# Altium PCB upper-pcb.PcbDoc
Units mil, origin at the board's own origin, x right, y up, seen from the top; angles counter-clockwise.
Board outline 1799.21 x 2429.13 mil, 2 copper layers (Top Layer, Bottom Layer), stack 63.824 mil thick; 78 components, 65 nets, 267 pads, 70 vias.
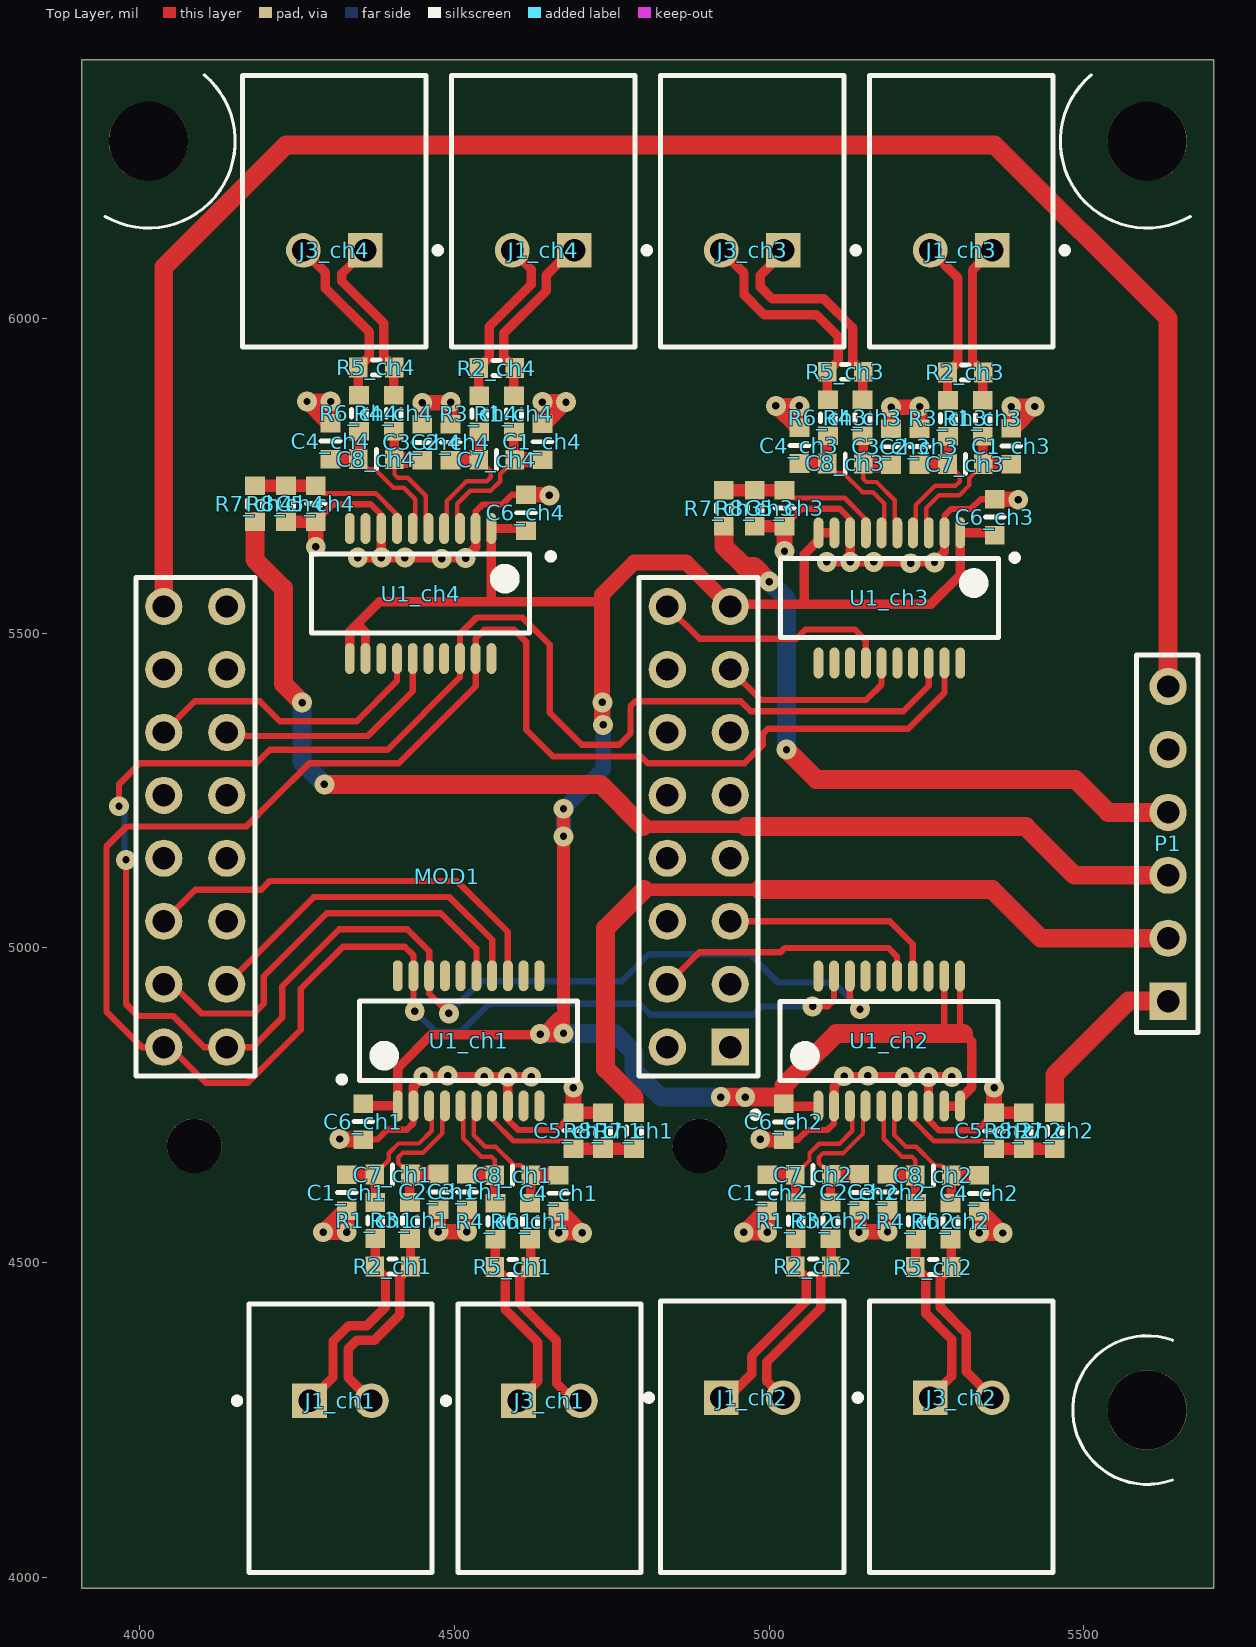
[diagram p0: Top Layer view]
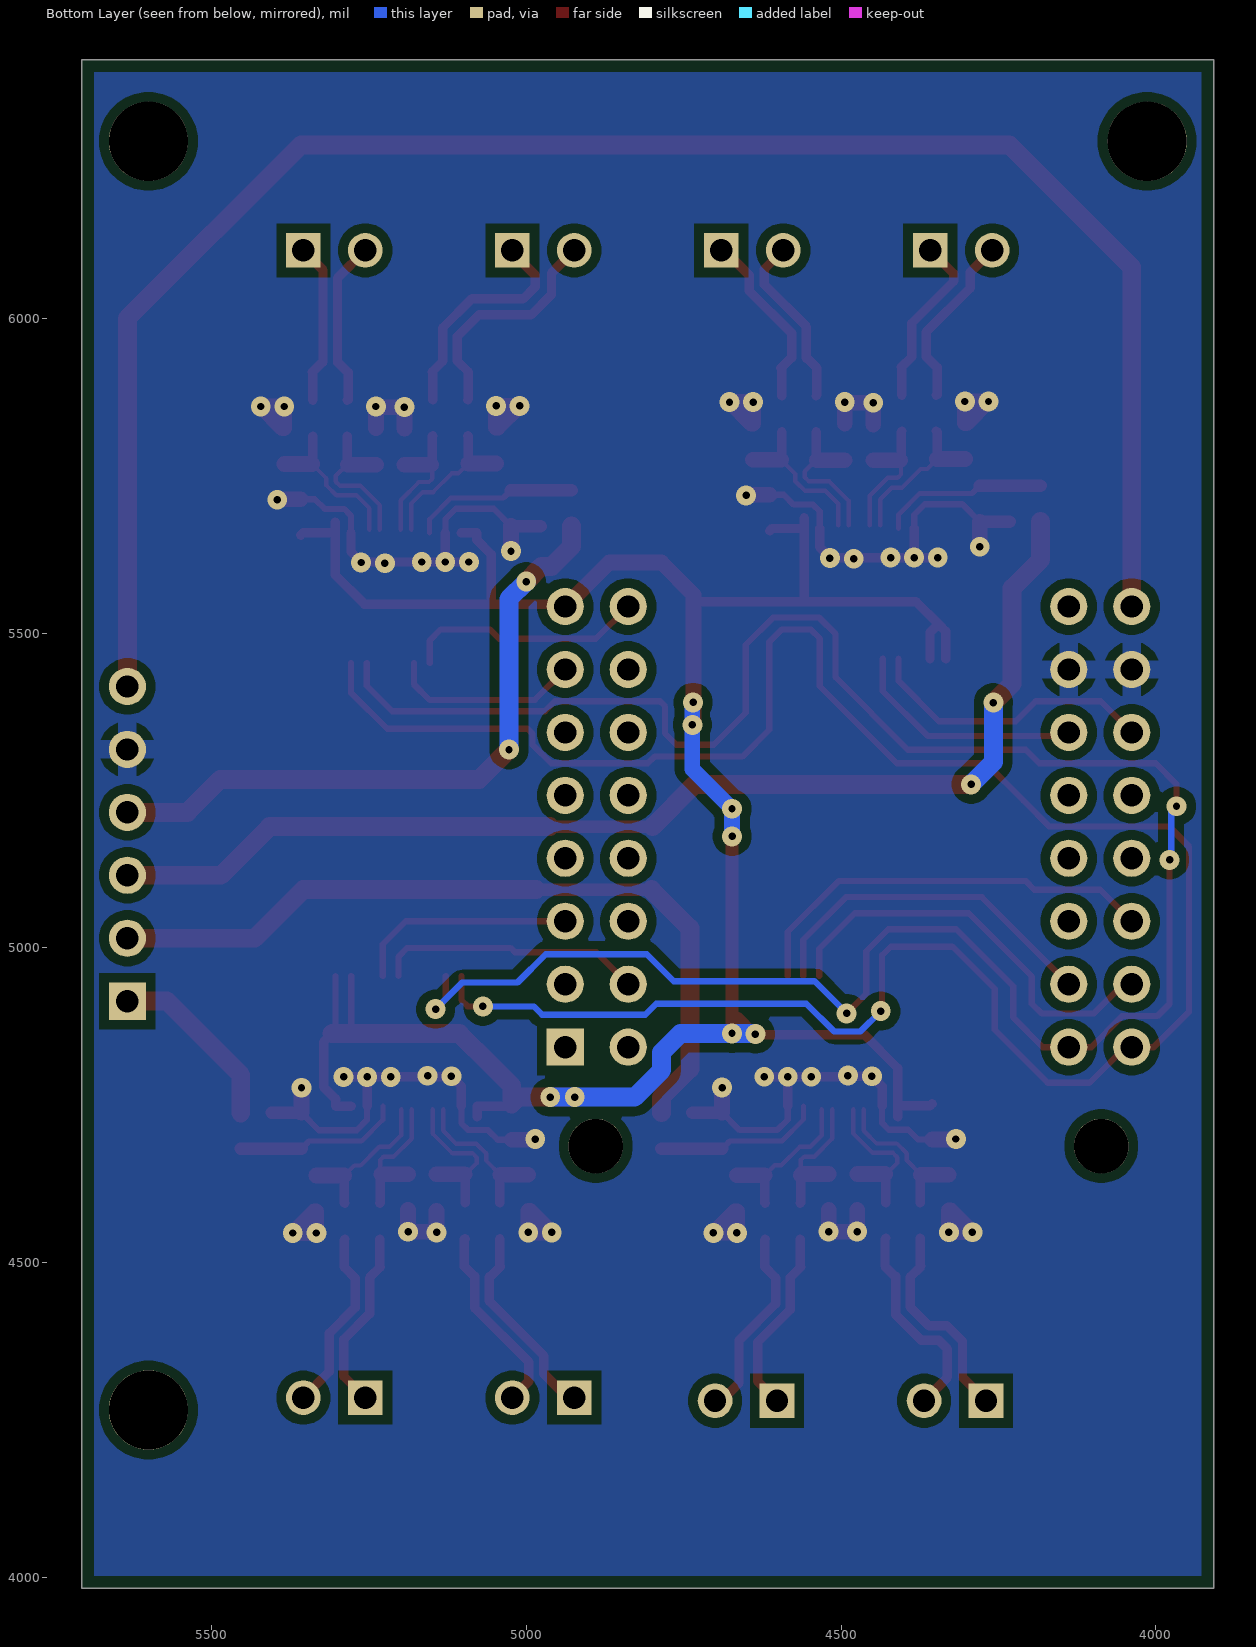
[diagram p1: Bottom Layer view, seen from below]

## Layer stack, top to bottom
Top Solder: solder mask 0.4, Solder Resist, Dk 3.5
Top Layer: signal copper 1.4
Dielectric 1: dielectric 61.0236, FR-4, Dk 4.8
Bottom Layer: signal copper 1.4
Bottom Solder: solder mask 0.4, Solder Resist, Dk 3.5

## Board outline
3907.48,3982.28 3907.48,6411.42 5706.69,6411.42 5706.69,3982.28

## Design rules (kind name [scope] priority, off if disabled: settings)
BoardOutlineClearance [All] p1: gap=19.68 ignorepadtopadclearanceinfootprint=FALSE
Clearance Clearance_polygon [InPolygon] p1: gap=15 ignorepadtopadclearanceinfootprint=FALSE
Clearance [All] p2: gap=8 ignorepadtopadclearanceinfootprint=FALSE
ComponentClearance ComponentClearance_1 [InComponent('No Component') vs InComponent('No Component')] p1: gap=0 collisioncheckmode=3 verticalgap=0 showdistances=FALSE donotcheckwithout3dbody=TRUE
ComponentClearance ComponentClearance_2 [HasFootprint('DG128-7.5-02P-14') vs HasFootprint('DG128-7.5-02P-14')] p2: gap=0 collisioncheckmode=3 verticalgap=0 showdistances=FALSE donotcheckwithout3dbody=TRUE
ComponentClearance [All] p3: gap=10 collisioncheckmode=3 verticalgap=10 showdistances=FALSE donotcheckwithout3dbody=TRUE
HoleSize [All] p1: absolutevalues=TRUE maxlimit=196.85 minlimit=11.81 maxpercent=80.000 minpercent=20.000
MinimumAnnularRing [All] p1: minimumring=8
MinimumSolderMaskSliver MinimumSolderMaskSliver-SSOP [HasFootprint('SSOP20_3.9x8.65') vs HasFootprint('SSOP20_3.9x8.65')] p1: minsoldermaskwidth=1
MinimumSolderMaskSliver MinimumSolderMaskSliver_1 [All] p2: minsoldermaskwidth=4.7
PolygonConnect VIA [IsVia] p1: connectstyle=Direct reliefconductorwidth=10 reliefentries=4 polygonreliefangle="90 Angle" airgapwidth=10
PolygonConnect [All] p2: connectstyle=Relief reliefconductorwidth=30 reliefentries=4 polygonreliefangle="90 Angle" airgapwidth=15
RoomDefinition ch2 [InComponentClass('ch2')] p1: confinementstyle=ConfineIn formatcopy=TRUE lockcomponents=FALSE outline 4788,3962.35 5483.2,3962.35 5483.2,4997.79 4788,4997.79
RoomDefinition ch3 [InComponentClass('ch3')] p2: confinementstyle=ConfineIn formatcopy=TRUE lockcomponents=FALSE outline 5489,6445.79 4807,6445.79 4807,5410.35 5489,5410.35
RoomDefinition ch4 [InComponentClass('ch4')] p3: confinementstyle=ConfineIn formatcopy=TRUE lockcomponents=FALSE outline 4816,6452.76 4153.54,6452.76 4153.54,5417.32 4816,5417.32
RoomDefinition ch1 [InComponentClass('ch1')] p4: confinementstyle=ConfineIn formatcopy=TRUE lockcomponents=FALSE outline 4133.86,3962.6 4814.96,3962.6 4814.96,4998.03 4133.86,4998.03
RoutingVias [All] p1: holewidth=11.81 width=31.5 viastyle="Through Hole" minholewidth=11.81 minwidth=31.5 maxholewidth=11.81 maxwidth=31.5
SilkToSilkClearance [All] p1: silktosilkclearance=1
SilkToSolderMaskClearance [IsPad] p1: minsilkscreentomaskgap=1 clearancetoexposedcopper=TRUE
SolderMaskExpansion SolderMaskExpansion-Via [IsVia] p1: expansion=4 istentingtop=TRUE
SolderMaskExpansion SolderMaskExpansion_1 [All] p2: expansion=4 istentingtop=FALSE
Width [All] p1: maxlimit=100 minlimit=7 preferedwidth=10 minimp=50.000000 maximp=50.000000 favimp=50.000000
25 further rules are at their usual default settings.

## Classes and differential pairs
channel class channel: ch1 ch2 ch3 ch4
component class upper-pcb: MOD1 P1
component class ch4: C1_ch4 C2_ch4 C3_ch4 C4_ch4 C5_ch4 C6_ch4 C7_ch4 C8_ch4 J1_ch4 J3_ch4 R1_ch4 R2_ch4 R3_ch4 R4_ch4 R5_ch4 R6_ch4 R7_ch4 R8_ch4 U1_ch4 U4
component class ch3: C1_ch3 C2_ch3 C3_ch3 C4_ch3 C5_ch3 C6_ch3 C7_ch3 C8_ch3 J1_ch3 J3_ch3 R1_ch3 R2_ch3 R3_ch3 R4_ch3 R5_ch3 R6_ch3 R7_ch3 R8_ch3 U1_ch3 U3
component class ch2: C1_ch2 C2_ch2 C3_ch2 C4_ch2 C5_ch2 C6_ch2 C7_ch2 C8_ch2 J1_ch2 J3_ch2 R1_ch2 R2_ch2 R3_ch2 R4_ch2 R5_ch2 R6_ch2 R7_ch2 R8_ch2 U1_ch2 U2
component class ch1: C1_ch1 C2_ch1 C3_ch1 C4_ch1 C5_ch1 C6_ch1 C7_ch1 C8_ch1 J1_ch1 J3_ch1 R1_ch1 R2_ch1 R3_ch1 R4_ch1 R5_ch1 R6_ch1 R7_ch1 R8_ch1 U1_ch1

## Components (designator, comment, footprint, x,y, rotation, side; value= is the part's Value field where it differs from the comment)
C1_ch1 "Ceramic X7R" C_0603_1608 4328.74,4611.2 r270 top value=33nF (schematic designator C1)
C1_ch2 "Ceramic X7R" C_0603_1608 4996.98,4610.96 r270 top value=33nF (schematic designator C1)
C1_ch3 "Ceramic X7R" C_0603_1608 5384.65,5797.18 r90 top value=33nF (schematic designator C1)
C1_ch4 "Ceramic X7R" C_0603_1608 4639.76,5804.15 r90 top value=33nF (schematic designator C1)
C2_ch1 "Ceramic X7R" C_0603_1608 4474.41,4612.2 r90 top value=33nF (schematic designator C2)
C2_ch2 "Ceramic X7R" C_0603_1608 5142.98,4611.76 r90 top value=33nF (schematic designator C2)
C2_ch3 "Ceramic X7R" C_0603_1608 5238.65,5796.39 r270 top value=33nF (schematic designator C2)
C2_ch4 "Ceramic X7R" C_0603_1608 4493.77,5803.35 r270 top value=33nF (schematic designator C2)
C3_ch1 "Ceramic X7R" C_0603_1608 4519.69,4612.2 r270 top value=33nF (schematic designator C3)
C3_ch2 "Ceramic X7R" C_0603_1608 5187.93,4611.96 r270 top value=33nF (schematic designator C3)
C3_ch3 "Ceramic X7R" C_0603_1608 5193.7,5796.18 r90 top value=33nF (schematic designator C3)
C3_ch4 "Ceramic X7R" C_0603_1608 4448.82,5803.15 r90 top value=33nF (schematic designator C3)
C4_ch1 "Ceramic X7R" C_0603_1608 4665.35,4610.24 r90 top value=33nF (schematic designator C4)
C4_ch2 "Ceramic X7R" C_0603_1608 5333.6,4609.99 r90 top value=33nF (schematic designator C4)
C4_ch3 "Ceramic X7R" C_0603_1608 5048.03,5798.15 r270 top value=33nF (schematic designator C4)
C4_ch4 "Ceramic X7R" C_0603_1608 4303.15,5805.12 r270 top value=33nF (schematic designator C4)
C5_ch1 "Ceramic X7R" C_0603_1608 4688.98,4709.65 r90 top value=33nF (schematic designator C5)
C5_ch2 "Ceramic X7R" C_0603_1608 5357.22,4709.4 r90 top value=33nF (schematic designator C5)
C5_ch3 "Ceramic X7R" C_0603_1608 5024.41,5698.74 r270 top value=33nF (schematic designator C5)
C5_ch4 "Ceramic X7R" C_0603_1608 4279.53,5705.71 r270 top value=33nF (schematic designator C5)
C6_ch1 "Ceramic X7R" C_0603_1608 4355,4724 r270 top value=100nF (schematic designator C6)
C6_ch2 "Ceramic X7R" C_0603_1608 5023.24,4723.76 r270 top value=100nF (schematic designator C6)
C6_ch3 "Ceramic X7R" C_0603_1608 5358.39,5684.39 r90 top value=100nF (schematic designator C6)
C6_ch4 "Ceramic X7R" C_0603_1608 4613.5,5691.35 r90 top value=100nF (schematic designator C6)
C7_ch1 "Ceramic X7R" C_0603_1608 4401.57,4639.75 r0 top value=33nF (schematic designator C7)
C7_ch2 "Ceramic X7R" C_0603_1608 5069.82,4639.5 r0 top value=33nF (schematic designator C7)
C7_ch3 "Ceramic X7R" C_0603_1608 5311.81,5768.64 r180 top value=33nF (schematic designator C7)
C7_ch4 "Ceramic X7R" C_0603_1608 4566.93,5775.61 r180 top value=33nF (schematic designator C7)
C8_ch1 "Ceramic X7R" C_0603_1608 4592.52,4638.78 r0 top value=33nF (schematic designator C8)
C8_ch2 "Ceramic X7R" C_0603_1608 5260.76,4638.54 r0 top value=33nF (schematic designator C8)
C8_ch3 "Ceramic X7R" C_0603_1608 5120.87,5769.61 r180 top value=33nF (schematic designator C8)
C8_ch4 "Ceramic X7R" C_0603_1608 4375.98,5776.57 r180 top value=33nF (schematic designator C8)
J1_ch1 "S2B-XH-A-1(LF)(SN)" FP-S2B-XH-A-1_LF_SN-MFG 4318.9,4207.68 r180 top locked (schematic designator J1)
J1_ch2 "S2B-XH-A-1(LF)(SN)" FP-S2B-XH-A-1_LF_SN-MFG 4973.1,4212.6 r180 top locked (schematic designator J1)
J1_ch3 "S2B-XH-A-1(LF)(SN)" FP-S2B-XH-A-1_LF_SN-MFG 5305.12,6181.1 r0 top locked (schematic designator J1)
J1_ch4 "S2B-XH-A-1(LF)(SN)" FP-S2B-XH-A-1_LF_SN-MFG 4641.08,6181.1 r0 top locked (schematic designator J1)
J3_ch1 "S2B-XH-A-1(LF)(SN)" FP-S2B-XH-A-1_LF_SN-MFG 4650.92,4207.68 r180 top locked (schematic designator J3)
J3_ch2 "S2B-XH-A-1(LF)(SN)" FP-S2B-XH-A-1_LF_SN-MFG 5305.12,4212.6 r180 top locked (schematic designator J3)
J3_ch3 "S2B-XH-A-1(LF)(SN)" FP-S2B-XH-A-1_LF_SN-MFG 4973.1,6181.1 r0 top locked (schematic designator J3)
J3_ch4 "S2B-XH-A-1(LF)(SN)" FP-S2B-XH-A-1_LF_SN-MFG 4309.06,6181.1 r0 top locked (schematic designator J3)
MOD1 "ESP32-S2FN4R2 mini wifi board" MOD_ESP32_WEMOS_S2_MINI 4488.19,5208.66 r180 top locked value=MOD_ESP32_WEMOS_S2_MINI
P1 "Goldpin" P_HEADER_1x6_2.54 5633.86,5165.35 r90 top value=DS1021-1*6SF1-1
R1_ch1 "Resistor" R_0603_1608 4374.02,4566.91 r90 top value=1k (schematic designator R1)
R1_ch2 "Resistor" R_0603_1608 5042.26,4566.67 r90 top value=1k (schematic designator R1)
R1_ch3 "Resistor" R_0603_1608 5339.37,5841.47 r270 top value=1k (schematic designator R1)
R1_ch4 "Resistor" R_0603_1608 4594.49,5848.44 r270 top value=1k (schematic designator R1)
R2_ch1 "Resistor" R_0603_1608 4401.57,4494.08 r0 top value=3.3R (schematic designator R2)
R2_ch2 "Resistor" R_0603_1608 5069.82,4493.83 r0 top value=3.3R (schematic designator R2)
R2_ch3 "Resistor" R_0603_1608 5311.81,5914.31 r180 top value=3.3R (schematic designator R2)
R2_ch4 "Resistor" R_0603_1608 4566.93,5921.28 r180 top value=3.3R (schematic designator R2)
R3_ch1 "Resistor" R_0603_1608 4429.13,4566.91 r90 top value=1k (schematic designator R3)
R3_ch2 "Resistor" R_0603_1608 5097.38,4566.67 r90 top value=1k (schematic designator R3)
R3_ch3 "Resistor" R_0603_1608 5284.25,5841.47 r270 top value=1k (schematic designator R3)
R3_ch4 "Resistor" R_0603_1608 4539.37,5848.44 r270 top value=1k (schematic designator R3)
R4_ch1 "Resistor" R_0603_1608 4564.96,4565.94 r90 top value=1k (schematic designator R4)
R4_ch2 "Resistor" R_0603_1608 5233.2,4565.7 r90 top value=1k (schematic designator R4)
R4_ch3 "Resistor" R_0603_1608 5148.43,5842.44 r270 top value=1k (schematic designator R4)
R4_ch4 "Resistor" R_0603_1608 4403.54,5849.41 r270 top value=1k (schematic designator R4)
R5_ch1 "Resistor" R_0603_1608 4592.52,4493.11 r0 top value=3.3R (schematic designator R5)
R5_ch2 "Resistor" R_0603_1608 5260.76,4492.87 r0 top value=3.3R (schematic designator R5)
R5_ch3 "Resistor" R_0603_1608 5120.87,5915.28 r180 top value=3.3R (schematic designator R5)
R5_ch4 "Resistor" R_0603_1608 4375.98,5922.24 r180 top value=3.3R (schematic designator R5)
R6_ch1 "Resistor" R_0603_1608 4620.08,4565.94 r90 top value=1k (schematic designator R6)
R6_ch2 "Resistor" R_0603_1608 5288.32,4565.7 r90 top value=1k (schematic designator R6)
R6_ch3 "Resistor" R_0603_1608 5093.31,5842.44 r270 top value=1k (schematic designator R6)
R6_ch4 "Resistor" R_0603_1608 4348.43,5849.41 r270 top value=1k (schematic designator R6)
R7_ch1 "Resistor" R_0603_1608 4785.43,4709.65 r270 top value=10k (schematic designator R7)
R7_ch2 "Resistor" R_0603_1608 5453.68,4709.4 r270 top value=10k (schematic designator R7)
R7_ch3 "Resistor" R_0603_1608 4927.95,5698.74 r90 top value=10k (schematic designator R7)
R7_ch4 "Resistor" R_0603_1608 4183.07,5705.71 r90 top value=10k (schematic designator R7)
R8_ch1 "Resistor" R_0603_1608 4736.22,4709.65 r270 top value=1k (schematic designator R8)
R8_ch2 "Resistor" R_0603_1608 5404.46,4709.4 r270 top value=1k (schematic designator R8)
R8_ch3 "Resistor" R_0603_1608 4977.17,5698.74 r90 top value=1k (schematic designator R8)
R8_ch4 "Resistor" R_0603_1608 4232.28,5705.71 r90 top value=1k (schematic designator R8)
U1_ch1 "Electrical mains 2-ch power meter" SSOP20_3.9x8.65 4522.34,4852.36 r0 top value=BL0939 (schematic designator U1)
U1_ch2 "Electrical mains 2-ch power meter" SSOP20_3.9x8.65 5190.59,4852.12 r0 top value=BL0939 (schematic designator U1)
U1_ch3 "Electrical mains 2-ch power meter" SSOP20_3.9x8.65 5191.04,5556.02 r180 top value=BL0939 (schematic designator U1)
U1_ch4 "Electrical mains 2-ch power meter" SSOP20_3.9x8.65 4446.16,5562.99 r180 top value=BL0939 (schematic designator U1)

## Footprints (in the part's own frame and the unit in brackets; to place one, negate y for a bottom-side part, rotate by r counter-clockwise, add the part's x,y. Pads: shape width x height; smd on the part's side, far side on the other; paste and mask are expansions set on the pad)
C_0603_1608 [mm]
  rect 0.75x0.8 smd: 1(-0.725,0) 2(0.725,0)
  silkscreen extent 0,-0.38 0,0.38, body extent -0.85,-0.45 0.85,0.45, height 0.89
FP-S2B-XH-A-1_LF_SN-MFG [mm]
  rect 1.4x1.4 hole 0.9 paste-2539.97 mask+0: 1(1.25,-1.85)
  round 1.4 hole 0.9 paste-2539.97 mask+0: 2(-1.25,-1.85)
  silkscreen extent -3.7,-5.75 4.3,5.08, body extent -3.8,-5.85 3.8,5.85, height 0.25
MOD_ESP32_WEMOS_S2_MINI [mm]
  rect 1.5x1.5 hole 0.9: 1(-11.43,9.305)
  round 1.5 hole 0.9: 2(-8.89,9.305) 3(-11.43,6.765) 4(-8.89,6.765) 5(-11.43,4.225) 6(-8.89,4.225) 7(-11.43,1.685) 8(-8.89,1.685) 9(-11.43,-0.855) 10(-8.89,-0.855) 11(-11.43,-3.395) 12(-8.89,-3.395) 13(-11.43,-5.935) 14(-8.89,-5.935) 15(-11.43,-8.475) 16(-8.89,-8.475) 17(8.89,9.305) 18(11.43,9.305) 19(8.89,6.765) 20(11.43,6.765) 21(8.89,4.225) 22(11.43,4.225) 23(8.89,1.685) 24(11.43,1.685) 25(8.89,-0.855) 26(11.43,-0.855) 27(8.89,-3.395) 28(11.43,-3.395) 29(8.89,-5.935) 30(11.43,-5.935) 31(8.89,-8.475) 32(11.43,-8.475)
  round 2.2 hole 2.2 unplated: DNC(-10.2,13.297) DNC(10.2,13.297)
  silkscreen extent -12.55,-9.64 12.55,10.47, body extent -12.74,-17.16 13.68,17.15, height 15.07
P_HEADER_1x6_2.54 [mm] "Connector; Header; 6 Position, Male"
  rect 1.5x1.5 hole 0.9: 1(-6.35,0)
  round 1.5 hole 0.9: 2(-3.81,0) 3(-1.27,0) 4(1.27,0) 5(3.81,0) 6(6.35,0)
  silkscreen extent -7.62,-1.2 7.62,1.27, body extent -7.52,-1.25 7.72,1.25, height 8.2
R_0603_1608 [mm]
  rect 0.75x0.8 smd: 1(-0.725,0) 2(0.725,0)
  silkscreen extent -0.15,-0.3 0.15,0.3, body extent -0.87,-0.47 0.88,0.48, height 0.54
SSOP20_3.9x8.65 [mm]
  oval 0.4x1.25 smd: 1(-2.857,-2.625) 2(-2.222,-2.625) 3(-1.587,-2.625) 4(-0.953,-2.625) 5(-0.318,-2.625) 6(0.318,-2.625) 7(0.953,-2.625) 8(1.587,-2.625) 9(2.222,-2.625) 10(2.857,-2.625) 11(2.857,2.625) 12(2.222,2.625) 13(1.587,2.625) 14(0.953,2.625) 15(0.318,2.625) 16(-0.318,2.625) 17(-0.953,2.625) 18(-1.587,2.625) 19(-2.222,2.625) 20(-2.857,2.625)
  silkscreen extent -5.24,-1.68 4.4,1.6, body extent -4.33,-2.96 4.33,2.96, height 1.68

## Part data
C1_ch1 C1_ch2 C1_ch3 C1_ch4 C2_ch1 C2_ch2 C2_ch3 C2_ch4 C3_ch1 C3_ch2 C3_ch3 C3_ch4 C4_ch1 C4_ch2 C4_ch3 C4_ch4 C5_ch1 C5_ch2 C5_ch3 C5_ch4 C7_ch1 C7_ch2 C7_ch3 C7_ch4 C8_ch1 C8_ch2 C8_ch3 C8_ch4: library part C_33nF_50V_X7R_0603_10, "Capacitor", Dielectric=X7R, Manufacturer=Yageo, Manufacturer Part Number=CC0603KRX7R9BB333, Tolerance (%)=10, Voltage=50V, HelpURL=https://datasheet.octopart.com/CC0603KRX7R9BB333-Yageo-datasheet-10883670.pdf, Part Number=C_33nF_50V_X7R_0603_10, SCH_Footprint=0603, Supplier 1=TME, Supplier 2="RS Components", Supplier 3=Farnell, Supplier 4=Mouser, Supplier 5=Digi-Key, Supplier 6=LCSC
C6_ch1 C6_ch2 C6_ch3 C6_ch4: library part C_100nF_50V_X7R_0603_5, "Capacitor", Dielectric=X7R, Manufacturer=Samsung, Manufacturer Part Number=CL10B104JB8NNNC, Tolerance (%)=5, Voltage=50V, HelpURL=http://www.tme.eu/pl/Document/4a42202b32dab16128fe107dd69598cc/samsung-chip-cap.pdf, Part Number=C_100nF_50V_X7R_0603_5, SCH_Footprint=0603, Supplier 1=TME, Supplier 2="RS Components", Supplier 3=Farnell, Supplier 4=Mouser, Supplier 5=Digi-Key, Supplier 6=LCSC, Supplier Part Number 1=CL10B104JB8NNNC, Supplier Part Number 2=7665455, Supplier Part Number 5=1276-1033-1-ND, Supplier Part Number 6=C24452
J1_ch1 J1_ch2 J1_ch3 J1_ch4 J3_ch1 J3_ch2 J3_ch3 J3_ch4: library part CMP-17439-000260-1, "CONN HEADER R/A 2POS 2.5MM", Flammability Rating="UL94 V-0", Insulation Color=Natural, Max Operating Temperature=85°C, Min Operating Temperature=-25°C, Voltage Rating=250V, Connector Type=Header, Contact Finish - Mating=TIN, Contact Material=Brass, Contact Shape=Square, Contact Type="Male Pin", Fastening Type=Detent, Insulation Material=Nylon, Lead Free="Lead Free", Mount="Through Hole", Number of Positions=2, Number of Rows=1, Packaging=Bulk, Series=XH, Termination=Press-Fit
MOD1: library part MOD_ESP32_WEMOS_S2_MINI, Manufacturer=Wemos, HelpURL=https://www.wemos.cc/en/latest/s2/s2_mini.html, Manufacturer Part Number=MOD_ESP32_WEMOS_S2_MINI, Part Number=MOD_ESP32_WEMOS_S2_MINI, SCH_Footprint=25.4x34.3mm, Supplier 1=TME, Supplier 2="RS Components", Supplier 3=Farnell, Supplier 4=Mouser, Supplier 5=Digi-Key, Supplier 6=LCSC, Supplier 7=Aliexpress, Supplier Part Number 7=https://pl.aliexpress.com/item/1005003145192016.html
P1: library part P_HEADER_1x6_2.54, "Pin Header", Manufacturer=Connfly, Manufacturer Part Number=DS1021-1*6SF1-1, Supplier Part Number 1=ZL201-06G, HelpURL=http://www.tme.eu/en/Document/cc301e58a5da78cb543a94b5a5b7f06a/DS1021.pdf, Part Number=P_HEADER_1x6_2.54, SCH_Footprint="1x6 2.54mm", Supplier 1=TME, Supplier 2="RS Components", Supplier 3=Farnell, Supplier 4=Mouser, Supplier 5=Digi-Key, Supplier 6=LCSC
R1_ch1 R1_ch2 R1_ch3 R1_ch4 R3_ch1 R3_ch2 R3_ch3 R3_ch4 R4_ch1 R4_ch2 R4_ch3 R4_ch4 R6_ch1 R6_ch2 R6_ch3 R6_ch4 R8_ch1 R8_ch2 R8_ch3 R8_ch4: library part R_1k_0603_1, Manufacturer=Vishay, Manufacturer Part Number=CRCW06031K00FKEA, Power=100mW, Tolerance=1%, Voltage=75V, HelpURL=http://www.farnell.com/datasheets/2310790.pdf?_ga=2.256888843.1690599162.1548417389-1379097396.1542296996&_gac=1.262631934.1547230258.Cj0KCQiAmuHhBRD0ARIsAFWyPwhX8HcvXnM3tA0ZBodZLzDIjH2ZxLpjT5LWo9bad_HPRbU8LfPq44UaAhEwEALw_wcB, Part Number=R_1k_0603_1, SCH_Footprint=0603, Supplier 1=TME, Supplier 2="RS Components", Supplier 3=Farnell, Supplier 4=Mouser, Supplier 5=Digi-Key, Supplier 6=LCSC, Supplier Part Number 2=678-9875P, Supplier Part Number 3=1469740, Supplier Part Number 4=71-CRCW0603-1.0K-E3, Supplier Part Number 5=541-1.00KHCT-ND
R2_ch1 R2_ch2 R2_ch3 R2_ch4 R5_ch1 R5_ch2 R5_ch3 R5_ch4: library part R_3.3R_0603_5, Manufacturer=Yageo, Manufacturer Part Number=RC0603JR-073R3L, Power=100mW, Supplier Part Number 1=RC0603JR-073R3, Tolerance=5%, Voltage=50V, HelpURL=https://datasheet.octopart.com/RC0603JR-073R3L-Yageo-datasheet-8328172.pdf, Part Number=R_3.3R_0603_5, SCH_Footprint=0603, Supplier 1=TME, Supplier 2="RS Components", Supplier 3=Farnell, Supplier 4=Mouser, Supplier 5=Digi-Key, Supplier 6=LCSC, Supplier Part Number 4=603-RC0603JR-073R3L, Supplier Part Number 5=311-3.3GRCT-ND
R7_ch1 R7_ch2 R7_ch3 R7_ch4: library part R_10k_0603_1, Manufacturer=Vishay, Manufacturer Part Number=CRCW060310K0FKTABC, Power=100mW, Tolerance=1%, Voltage=75V, HelpURL=http://www.tme.eu/pl/Document/622e28308c06d160637f2b14751ba16b/Data%20Sheet%20CRCW_BCe3.pdf, Part Number=R_10k_0603_1, SCH_Footprint=0603, Supplier 1=TME, Supplier 2="RS Components", Supplier 3=Farnell, Supplier 4=Mouser, Supplier 5=Digi-Key, Supplier 6=LCSC, Supplier Part Number 1=CRCW060310K0FKTABC, Supplier Part Number 4=667-ERJ-3EKF1002V, Supplier Part Number 5=P10KGCT-ND
U1_ch1 U1_ch2 U1_ch3 U1_ch4: library part U_BL0939, Manufacturer=Belling, Manufacturer Part Number=BL0939, HelpURL=https://www.belling.com.cn/media/file_object/bel_product/BL0939/datasheet/BL0939_V1.2_cn.pdf, Part Number=U_BL0939, SCH_Footprint=SSOP20, Supplier 1=TME, Supplier 2="RS Components", Supplier 3=Farnell, Supplier 4=Mouser, Supplier 5=Digi-Key, Supplier 6=LCSC, Supplier 7=Aliexpress, Supplier Part Number 6=C2841044, Supplier Part Number 7=BL0939

## Free pads (board coordinates)
  round 125.98 hole 125.98 unplated: ""(4013.78,6281.5) ""(5600.39,4265.75) ""(5600.39,6281.5)

## Via types
v1: diameter 31.5, hole 11.81, Top Layer to Bottom Layer, tented both sides, 70 vias

## Nets (pads, with @x,y where several pads share a name; then routed paths per layer and width w, separated by ;. In a path a pad name is that pad's centre, name@x,y a point inside that pad or via, vN(x,y) a via of type N, cw(c..) or ccw(c..) an arc to the next point about the centre after c; other vN are vias at no path point)
+3.3V: C6_ch1.1 C6_ch2.1 C6_ch3.1 C6_ch4.1 MOD1.15 U1_ch1.1 U1_ch2.1 U1_ch2.9 U1_ch2.10 U1_ch2.11 U1_ch2.12 U1_ch3.1 U1_ch3.9 U1_ch3.10 U1_ch4.1 U1_ch4.11 U1_ch4.12 | length 4200.3
  Top Layer w10: 5277,4864 5278.09,4865.09 U1_ch2.12 ; U1_ch2.11 5303.09,4869.41 5308.5,4864
  Top Layer w15: U1_ch4.11 4333.66,5502.83 4345.42,5514.58 ; C6_ch1.1 4358.53,4749.02 U1_ch1.1 ; U1_ch4.12 4358.66,5501.34 4345.42,5514.58 ; U1_ch1.1@4409.84,4731.69 U1_ch1.1 ; 4420,5549.75 4380.58,5549.75 ; U1_ch4.1@4558.66,5683.66 U1_ch4.1 ; C6_ch4.1 4609.98,5666.34 U1_ch4.1 ; v1@4636,4862.2 4463.2,4862.2 4409.84,4808.84 U1_ch1.1 ; 4734.25,5550 4734,5549.75 4558.66,5549.75 ; MOD1.15 4942.05,5546.18 5055.63,5546.18 ; C6_ch2.1 5026.77,4748.77 U1_ch2.1 U1_ch2.1@5078.09,4731.45 ; U1_ch3.9 U1_ch3.10 5078.54,5648.06 5055.63,5625.14 5055.63,5546.18 ; U1_ch2.9 U1_ch2.10 5303.09,4760.09 5322,4779 5322,4850.5 5308.5,4864 ; U1_ch3.1@5303.54,5676.69 U1_ch3.1 ; C6_ch3.1 5354.86,5659.37 U1_ch3.1 ; 4345.42,5514.58 4380.58,5549.75 ; 4380.58,5549.75 4558.66,5549.75 ; 4558.66,5549.75 U1_ch4.1 ; 5055.63,5546.18 5257.18,5546.18 5303.54,5592.54 U1_ch3.1
  Top Layer w20: v1@4639.56,4863 4665.56,4889 4673.23,4889 ; v1(4673.23,4864.17) 4673.23,4889 ; v1(4673.23,5221.09) 4673.23,4889
  Top Layer w25: v1(4636,4863) 4639.56,4863 4672.06,4863 v1(4673.23,4864.17) ; v1(4736.22,5354.33) 4734.25,5356.3 4734.25,5550 4734.25,5561.25 4785.2,5612.2 4868.31,5612.2 MOD1.15
  Top Layer w30: v1(4923,4763) v1(4962,4763) 5012.54,4763 C6_ch2.1 5023.24,4781 5055.51,4813.27 5106.24,4864 5277,4864 5308.5,4864
  Bottom Layer w25: v1(4673.17,5177.17) 4673.17,5221.04 v1(4673.23,5221.09) 4736.22,5284.09 v1(4736.22,5354.33) 4736.22,5388.78 v1(4735,5390)
  Bottom Layer w30: v1(4636,4863) 4637.17,4864.17 v1(4673.23,4864.17) 4754.83,4864.17 4785,4834 4785,4806 4828,4763 v1(4923,4763) v1(4962,4763)
C1_ch1_N: J1_ch1.2 R2_ch1.2 R3_ch1.1 | length 332.1
  Top Layer w15: J1_ch1.2 4331,4317.62 4331,4363 4345,4377 4373,4377 4413.39,4417.39 4413.39,4477.35 ; 4413.39,4478.35 4413.39,4477.35 ; R3_ch1.1 4430.12,4537.39 R2_ch1.2 4413.39,4477.35
C1_ch1_P: J1_ch1.1 R1_ch1.1 R2_ch1.1 | length 343.3
  Top Layer w15: J1_ch1.1@4279.51,4280.51 J1_ch1.1 4307,4317.83 4307,4375 4332,4400 4361,4400 4390.39,4429.39 4390.39,4476.72 ; R1_ch1.1 4374.02,4495.06 R2_ch1.1 4390.39,4476.72 ; 4390.39,4477.72 4390.39,4476.72
C1_ch2_N: J1_ch2.2 R2_ch2.2 R3_ch2.1 | length 321
  Top Layer w15: J1_ch2.2 4996,4311.74 4996,4342 5081.63,4427.63 5081.63,4477.1 ; J1_ch2.2@5026.75,4289.87 J1_ch2.2@5036.35,4280.27 ; 5081.63,4478.1 5081.63,4477.1 ; R3_ch2.1 5098.36,4537.14 R2_ch2.2 5081.63,4477.1
C1_ch2_P: J1_ch2.1 R1_ch2.1 R2_ch2.1 | length 323.3
  Top Layer w15: J1_ch2.1 4934.43,4285.43 4972,4323 4972,4352 5058.63,4438.63 5058.63,4476.48 ; R1_ch2.1 5042.26,4494.82 R2_ch2.1 5058.63,4476.48 ; 5058.63,4477.48 5058.63,4476.48
C1_ch3_N: J1_ch3.2 R2_ch3.2 R3_ch3.1 | length 264.9
  Top Layer w15: J1_ch3.2 5300,6064.17 5300,5931.04 ; R3_ch3.1 5283.27,5871 R2_ch3.2 5300,5931.04 ; 5300,5930.04 5300,5931.04
C1_ch3_P: J1_ch3.1 R1_ch3.1 R2_ch3.1 | length 259.8
  Top Layer w15: 5323,5930.66 5323,5931.66 ; R1_ch3.1 5339.37,5913.32 R2_ch3.1 5323,5931.66 ; J1_ch3.1 5323,6076.94 5323,5931.66
C1_ch4_N: J1_ch4.2 R2_ch4.2 R3_ch4.1 | length 279.8
  Top Layer w15: R3_ch4.1 4538.39,5877.97 R2_ch4.2 4555.12,5938.01 ; 4555.12,5937.01 4555.12,5938.01 ; J1_ch4.2 4622,6078.13 4622,6054 4555.12,5987.12 4555.12,5938.01
C1_ch4_P: J1_ch4.1 R1_ch4.1 R2_ch4.1 | length 289.3
  Top Layer w15: 4578.12,5937.63 4578.12,5938.63 ; R1_ch4.1 4594.49,5920.29 R2_ch4.1 4578.12,5938.63 ; J1_ch4.1 4685.27,6108.27 4646,6069 4646,6044 4578.12,5976.12 4578.12,5938.63
C2_ch1_N: J3_ch1.2 R5_ch1.2 R6_ch1.1 | length 310.4
  Top Layer w15: R6_ch1.1 4621.06,4536.42 R5_ch1.2 4603.71,4475.76 4603.71,4434.82 4662.1,4376.43 4662.1,4308.38 4689.96,4280.51 J3_ch1.2
C2_ch1_P: J3_ch1.1 R4_ch1.1 R5_ch1.1 | length 298.6
  Top Layer w15: R4_ch1.1 4564.96,4494.09 R5_ch1.1 4580.71,4476.38 4580.71,4425.29 4632.65,4373.35 4632.65,4311.46 J3_ch1.1
C2_ch2_N: J3_ch2.2 R5_ch2.2 R6_ch2.1 | length 303.6
  Top Layer w15: R6_ch2.1 5289.31,4536.17 R5_ch2.2 5271.95,4475.51 5271.95,4428.57 5313,4387.53 5313,4326.76 J3_ch2.2 ; J3_ch2.2@5358.2,4280.27 J3_ch2.2@5368.38,4280.27
C2_ch2_P: J3_ch2.1 R4_ch2.1 R5_ch2.1 | length 290.2
  Top Layer w15: R4_ch2.1 5233.2,4493.85 R5_ch2.1 5248.95,4476.13 5248.95,4419.05 5290,4378 5290,4319.53 J3_ch2.1
C2_ch3_N: J3_ch3.2 R5_ch3.2 R6_ch3.1 | length 370.5
  Top Layer w15: J3_ch3.2 4960,6072.15 4960,6038 4992,6006 5075,6006 5109.68,5971.32 5109.68,5932.63 R5_ch3.2 5092.32,5871.97 R6_ch3.1
C2_ch3_P: J3_ch3.1 R4_ch3.1 R5_ch3.1 | length 368.5
  Top Layer w15: J3_ch3.1 5022.31,6105.31 4986,6069 4986,6050 5005,6031 5087,6031 5132.68,5985.32 5132.68,5932.01 R5_ch3.1 5148.43,5914.29 R4_ch3.1
C2_ch4_N: J3_ch4.2 R5_ch4.2 R6_ch4.1 | length 281.4
  Top Layer w15: J3_ch4.2 4295,6073.11 4295,6048.09 4364.8,5978.29 4364.8,5939.6 R5_ch4.2 4347.44,5878.94 R6_ch4.1
C2_ch4_P: J3_ch4.1 R4_ch4.1 R5_ch4.1 | length 280.8
  Top Layer w15: J3_ch4.1 4321,6071 4321,6059.09 4387.8,5992.29 4387.8,5938.98 R5_ch4.1 4403.54,5921.26 R4_ch4.1
CF1: MOD1.20 U1_ch1.15 | length 673.6
  Top Layer w10: MOD1.20 4051.77,4942.32 4098.29,4895.81 4181.24,4895.81 4196.85,4911.42 4196.85,4954.72 4297.24,5055.12 4478.35,5055.12 4534.84,4998.62 U1_ch1.15
CF2: MOD1.4 U1_ch2.15 | length 425.1
  Top Layer w10: MOD1.4 4888.87,4993 5018,4993 5025,5000 5189,5000 5203.09,4985.91 U1_ch2.15
CF3: MOD1.13 U1_ch3.15 | length 304.7
  Top Layer w10: MOD1.13 4986.53,5393.98 5153.98,5393.98 5178.54,5418.54 U1_ch3.15
CF4: MOD1.27 U1_ch4.15 | length 379
  Top Layer w10: MOD1.27 4143.9,5336.61 4362.2,5336.61 4433.66,5408.07 U1_ch4.15
F1_ch1_N: C2_ch1.2 C7_ch1.2 R3_ch1.2 U1_ch1.4 | length 247.2
  Top Layer w7: C7_ch1.2@4429.13,4639.87 4410.76,4658.24 4410.76,4667.59 4417.41,4674.24 4449.76,4674.24 4480.76,4705.24 U1_ch1.4@4480.76,4743.93
  Top Layer w15: R3_ch1.2 C7_ch1.2@4429.13,4638.76
  Top Layer w25: C7_ch1.2@4430.12,4640.75 C2_ch1.2
F1_ch1_P: C1_ch1.1 C7_ch1.1 R1_ch1.2 U1_ch1.3 | length 248.4
  Top Layer w7: C7_ch1.1 4395.76,4662.47 4395.76,4673.8 4411.2,4689.24 4422.53,4689.24 4443.54,4689.24 4463.93,4709.63 U1_ch1.3@4463.93,4743.93
  Top Layer w15: R1_ch1.2 C7_ch1.1@4374.02,4638.76
  Top Layer w25: C1_ch1.1 C7_ch1.1
F1_ch2_N: C2_ch2.2 C7_ch2.2 R3_ch2.2 U1_ch2.4 | length 248.3
  Top Layer w7: C7_ch2.2@5097.38,4638.52 5097.38,4639.62 5079,4658 5079,4667.34 5085.66,4674 5118,4674 5149,4705 U1_ch2.4@5149,4743.69
  Top Layer w15: R3_ch2.2 C7_ch2.2@5097.38,4638.52
  Top Layer w25: C7_ch2.2@5098.36,4640.5 C2_ch2.2@5142.65,4640.5
F1_ch2_P: C1_ch2.1 C7_ch2.1 R1_ch2.2 U1_ch2.3 | length 248.4
  Top Layer w7: C7_ch2.1 5064,4662.23 5064,4673.56 5079.44,4689 5090.77,4689 5111.79,4689 5132.17,4709.39 U1_ch2.3@5132.17,4743.69
  Top Layer w15: R1_ch2.2 C7_ch2.1@5042.26,4638.52
  Top Layer w25: C1_ch2.1 C7_ch2.1
F1_ch3_N: C2_ch3.2 C7_ch3.2 R3_ch3.2 U1_ch3.4 | length 248.3
  Top Layer w7: U1_ch3.4@5232.63,5664.46 5232.63,5703.14 5263.63,5734.14 5295.97,5734.14 5302.63,5740.8 5302.63,5750.14 5284.25,5768.52 C7_ch3.2@5284.25,5769.62
  Top Layer w15: C7_ch3.2@5284.25,5769.62 R3_ch3.2
  Top Layer w25: C2_ch3.2@5238.98,5767.64 C7_ch3.2@5283.27,5767.64
F1_ch3_P: C1_ch3.1 C7_ch3.1 R1_ch3.2 U1_ch3.3 | length 248.4
  Top Layer w7: U1_ch3.3@5249.46,5664.46 5249.46,5698.76 5269.84,5719.14 5290.86,5719.14 5302.19,5719.14 5317.63,5734.59 5317.63,5745.91 C7_ch3.1
  Top Layer w15: C7_ch3.1@5339.37,5769.62 R1_ch3.2
  Top Layer w25: C7_ch3.1 C1_ch3.1
F1_ch4_N: C2_ch4.2 C7_ch4.2 R3_ch4.2 U1_ch4.4 | length 248.3
  Top Layer w7: U1_ch4.4@4487.75,5671.43 4487.75,5710.11 4518.75,5741.11 4551.09,5741.11 4557.75,5747.77 4557.75,5757.11 4539.37,5775.49 C7_ch4.2@4539.37,5776.59
  Top Layer w15: C7_ch4.2@4539.37,5776.59 R3_ch4.2
  Top Layer w25: C2_ch4.2@4494.09,5774.61 C7_ch4.2@4538.39,5774.61
F1_ch4_P: C1_ch4.1 C7_ch4.1 R1_ch4.2 U1_ch4.3 | length 248.4
  Top Layer w7: U1_ch4.3@4504.57,5671.43 4504.57,5705.72 4524.96,5726.11 4545.98,5726.11 4557.3,5726.11 4572.75,5741.55 4572.75,5752.88 C7_ch4.1
  Top Layer w15: C7_ch4.1@4594.49,5776.59 R1_ch4.2
  Top Layer w25: C7_ch4.1 C1_ch4.1
F2_ch1_N: C4_ch1.2 C8_ch1.2 R6_ch1.2 U1_ch1.6 | length 247.1
  Top Layer w7: U1_ch1.6@4530.76,4743.93 4530.76,4702.46 4548.97,4684.24 4565.29,4684.24 4595.02,4654.51 4605.33,4654.51 C8_ch1.2
  Top Layer w15: R6_ch1.2 4621.06,4595.47 C8_ch1.2
  Top Layer w25: C8_ch1.2 C4_ch1.2
F2_ch1_P: C3_ch1.1 C8_ch1.1 R4_ch1.2 U1_ch1.5 | length 225.7
  Top Layer w7: U1_ch1.5@4513.93,4743.93 4513.93,4697.07 4542.76,4668.24 4558.76,4668.24 4563.76,4663.24 4563.76,4642.5 C8_ch1.1@4562.01,4640.75 ; C8_ch1.1 C8_ch1.1@4563.98,4640.75
  Top Layer w15: C8_ch1.1 4563.98,4595.47 R4_ch1.2
  Top Layer w25: C3_ch1.1 4562.01,4640.75 C8_ch1.1
F2_ch2_N: C4_ch2.2 C8_ch2.2 R6_ch2.2 U1_ch2.6 | length 247.1
  Top Layer w7: U1_ch2.6@5199,4743.69 5199,4702.21 5217.21,4684 5233.53,4684 5263.27,4654.27 5273.58,4654.27 C8_ch2.2
  Top Layer w15: R6_ch2.2 5289.31,4595.23 C8_ch2.2
  Top Layer w25: C8_ch2.2 C4_ch2.2
F2_ch2_P: C3_ch2.1 C8_ch2.1 R4_ch2.2 U1_ch2.5 | length 222.9
  Top Layer w7: U1_ch2.5@5182.17,4743.69 5182.17,4696.83 5211,4668 5227,4668 5232,4663 5232,4642.25 C8_ch2.1@5230.25,4640.5 ; C8_ch2.1 C8_ch2.1@5232.22,4640.5
  Top Layer w15: C8_ch2.1 5232.22,4595.23 R4_ch2.2
  Top Layer w25: C3_ch2.1 C8_ch2.1@5230.25,4640.5
F2_ch3_N: C4_ch3.2 C8_ch3.2 R6_ch3.2 U1_ch3.6 | length 247.1
  Top Layer w7: C8_ch3.2 5108.05,5753.88 5118.36,5753.88 5148.1,5724.14 5164.42,5724.14 5182.63,5705.93 U1_ch3.6@5182.63,5664.46
  Top Layer w15: C8_ch3.2 5092.32,5812.91 R6_ch3.2
  Top Layer w25: C4_ch3.2 C8_ch3.2
F2_ch3_P: C3_ch3.1 C8_ch3.1 R4_ch3.2 U1_ch3.5 | length 222.9
  Top Layer w7: C8_ch3.1@5149.41,5767.64 C8_ch3.1 ; C8_ch3.1@5151.38,5767.64 5149.63,5765.89 5149.63,5745.14 5154.63,5740.14 5170.63,5740.14 5199.46,5711.31 U1_ch3.5@5199.46,5664.46
  Top Layer w15: R4_ch3.2 5149.41,5812.91 C8_ch3.1
  Top Layer w25: C8_ch3.1@5151.38,5767.64 C3_ch3.1
F2_ch4_N: C4_ch4.2 C8_ch4.2 R6_ch4.2 U1_ch4.6 | length 247.1
  Top Layer w7: C8_ch4.2 4363.17,5760.84 4373.48,5760.84 4403.22,5731.11 4419.53,5731.11 4437.75,5712.9 U1_ch4.6@4437.75,5671.43
  Top Layer w15: C8_ch4.2 4347.44,5819.88 R6_ch4.2
  Top Layer w25: C4_ch4.2 C8_ch4.2
F2_ch4_P: C3_ch4.1 C8_ch4.1 R4_ch4.2 U1_ch4.5 | length 222.9
  Top Layer w7: C8_ch4.1@4404.53,5774.61 C8_ch4.1 ; C8_ch4.1@4406.5,5774.61 4404.75,5772.86 4404.75,5752.11 4409.75,5747.11 4425.75,5747.11 4454.57,5718.28 U1_ch4.5@4454.57,5671.43
  Top Layer w15: R4_ch4.2 4404.53,5819.88 C8_ch4.1
  Top Layer w25: C8_ch4.1@4406.5,5774.61 C3_ch4.1
GND: C1_ch1.2 C1_ch2.2 C1_ch3.2 C1_ch4.2 C2_ch1.1 C2_ch2.1 C2_ch3.1 C2_ch4.1 C3_ch1.2 C3_ch2.2 C3_ch3.2 C3_ch4.2 C4_ch1.1 C4_ch2.1 C4_ch3.1 C4_ch4.1 C5_ch1.2 C5_ch2.2 C5_ch3.2 C5_ch4.2 C6_ch1.2 C6_ch2.2 C6_ch3.2 C6_ch4.2 MOD1.29 MOD1.30 P1.5 R8_ch1.1 R8_ch2.1 R8_ch3.1 R8_ch4.1 U1_ch1.2 U1_ch1.8 U1_ch2.2 U1_ch2.8 U1_ch3.2 U1_ch3.8 U1_ch4.2 U1_ch4.8 | length 4086.2
  Top Layer w10: C5_ch4.2 4307.09,5704.72 4367.13,5704.72 4383.66,5688.19 U1_ch4.8 ; C6_ch1.2 4377.46,4695.46 4393,4711 4424,4711 4434.84,4721.84 U1_ch1.2 ; U1_ch4.2 4533.66,5693.51 4544.5,5704.35 4575.5,5704.35 4591.05,5719.9 C6_ch4.2 ; U1_ch1.8 4584.84,4727.17 4601.38,4710.63 4661.42,4710.63 C5_ch1.2 ; C6_ch2.2 5045.7,4695.21 5061.24,4710.76 5092.24,4710.76 5103.09,4721.6 U1_ch2.2 ; C5_ch3.2 5051.97,5697.76 5112.01,5697.76 5128.54,5681.22 U1_ch3.8 ; U1_ch2.8 5253.09,4726.92 5269.62,4710.39 5329.66,4710.39 C5_ch2.2 ; U1_ch3.2 5278.54,5686.54 5289.39,5697.39 5320.39,5697.39 5335.93,5712.93 C6_ch3.2
  Top Layer w15: v1(4346.46,5620.08) v1(4383.86,5620.08) ; U1_ch4.8 4383.66,5620.28 v1(4383.86,5620.08) ; U1_ch1.2 4434.84,4779.84 4451,4796 4486.55,4796 4487.28,4795.28 v1@4489,4797 ; v1@4450.97,4796.03 v1(4450.97,4796.1) ; v1(4479.88,5618.21) v1@4479.88,5620.08 ; v1(4489.01,4797.09) v1@4489,4797 ; v1(4517.73,5619.31) 4517.73,5619.85 v1@4517.5,5620.08 ; U1_ch4.2 4533.66,5636.24 v1@4517.5,5620.08 ; U1_ch1.8 4584.84,4795.08 v1(4584.65,4795.28) ; v1(4622.05,4795.28) v1(4584.65,4795.28) ; v1(5091.34,5613.11) v1(5128.74,5613.11) ; U1_ch2.2 5103.09,4780.09 v1(5119,4796) 5119.97,4795.03 5156.87,4795.03 v1(5156.87,4796.9) ; U1_ch3.8 5128.54,5613.31 v1(5128.74,5613.11) ; v1@5156.65,4795.03 v1(5215.49,4795.03) v1(5252.89,4795.03) ; v1(5224.76,5611.24) v1@5224.76,5613.11 ; U1_ch2.8 5253.09,4794.83 v1(5252.89,4795.03) ; v1(5262.61,5612.34) 5262.61,5612.88 v1@5262.39,5613.11 ; U1_ch3.2 5278.54,5629.27 v1@5262.39,5613.11 ; v1(5290.29,4795.03) v1(5252.89,4795.03) ; v1(4383.86,5620.08) v1(4421.26,5620.08) 4480.1,5620.08 v1@4517.5,5620.08 ; v1@4489,4797 4490.72,4795.28 v1(4547.24,4795.28) v1(4584.65,4795.28) ; v1(5128.74,5613.11) v1(5166.14,5613.11) 5224.98,5613.11 v1@5262.39,5613.11
  Top Layer w20: R8_ch4.1 C5_ch4.2 ; C5_ch1.2 R8_ch1.1 ; R8_ch3.1 C5_ch3.2 ; C5_ch2.2 R8_ch2.1
  Top Layer w25: v1(4279.5,5637.35) C5_ch4.2 ; v1(4317.6,4696.44) 4318.58,4695.46 C6_ch1.2 ; C3_ch4.2 v1(4448.82,5866.14) v1@4494.09,5866.14 ; C2_ch1.1 v1(4474.41,4549.21) v1(4519.69,4549.21) C3_ch1.2 ; C2_ch4.1@4494.09,5832.69 v1(4494.09,5867.14) ; C6_ch4.2 4649.92,5719.9 v1(4650.91,5718.91) ; C5_ch1.2 v1(4689,4778) ; v1(4985.84,4696.2) 4986.83,4695.21 C6_ch2.2 ; v1(5024.39,5630.39) C5_ch3.2 ; v1(5142.65,4547.97) C2_ch2.1@5142.65,4582.42 ; v1@5142.65,4548.97 v1(5187.93,4548.97) C3_ch2.2 ; C3_ch3.2 v1(5193.7,5859.17) v1@5238.98,5859.17 ; C2_ch3.1@5238.98,5825.72 v1(5238.98,5860.17) ; C5_ch2.2 v1@5357.22,4777.73 ; C6_ch3.2 5394.8,5712.93 v1(5395.79,5711.94) ; v1(4265.75,5868.11) 4300.2,5833.66 C4_ch4.1 v1(4303.15,5868.11) v1(4265.75,5868.11) ; v1(4291.34,4548.21) 4325.79,4582.66 C1_ch1.2 v1(4328.74,4548.21) v1(4291.34,4548.21) ; C1_ch4.2 v1(4639.76,5867.14) v1(4677.17,5867.14) 4642.72,5832.69 C1_ch4.2 ; v1(4665.35,4547.24) v1(4702.76,4547.24) 4668.31,4581.69 C4_ch1.1 v1(4665.35,4547.24) ; v1(4959.58,4547.97) v1(4996.98,4547.97) C1_ch2.2 4994.03,4582.42 v1(4959.58,4547.97) ; v1(5010.63,5861.14) v1(5048.03,5861.14) C4_ch3.1 5045.08,5826.69 v1(5010.63,5861.14) ; v1(5333.6,4547) v1(5371,4547) 5336.55,4581.45 C4_ch2.1 v1(5333.6,4547) ; C1_ch3.2 5387.6,5825.72 v1(5422.05,5860.17) v1(5384.65,5860.17) C1_ch3.2
  other v1: 5357.24,4777.76
IL1: MOD1.19 U1_ch1.14 | length 564.3
  Top Layer w10: MOD1.19 4276.57,5080.71 4492.13,5080.71 4559.84,5012.99 U1_ch1.14
IL2: MOD1.5 U1_ch2.14 | length 355.4
  Top Layer w10: MOD1.5 5191.68,5042.32 5228.09,5005.91 U1_ch2.14
IL3: MOD1.16 U1_ch3.14 | length 385.9
  Top Layer w10: MOD1.16 4889.51,5491 5043,5491 5058,5506 5136,5506 5153.54,5488.46 U1_ch3.14
IL4: MOD1.28 U1_ch4.14 | length 465.8
  Top Layer w10: MOD1.28 4087.6,5391.73 4190.94,5391.73 4222.44,5360.24 4344.49,5360.24 4408.66,5424.41 U1_ch4.14
NetU1_CH1_9: U1_ch1.9
NetU1_CH1_10: U1_ch1.10
NetU1_CH1_11: U1_ch1.11
NetU1_CH1_12: U1_ch1.12
NetU1_CH2_13: U1_ch2.13
NetU1_CH3_11: U1_ch3.11
NetU1_CH3_12: U1_ch3.12
NetU1_CH3_13: U1_ch3.13
NetU1_CH4_9: U1_ch4.9
NetU1_CH4_10: U1_ch4.10
NetU1_CH4_13: U1_ch4.13
RX1: MOD1.17 U1_ch1.18 U1_ch2.18 U1_ch3.18 U1_ch4.18 | length 3584.6
  Top Layer w10: v1(3967,5225) 3967,5260.31 4000,5293.31 4137.8,5293.31 ; v1(3978.1,5139.76) 3978.1,4910.9 3997.27,4891.73 4053.27,4891.73 4102.68,4842.32 MOD1.17 4179.32,4842.32 4226.38,4889.38 4226.38,4938.98 4316.93,5029.53 4425.2,5029.53 4459.84,4994.88 U1_ch1.18 4459.84,4927.19 v1(4491.1,4895.93) ; 4138.19,5292.91 4137.8,5293.31 ; U1_ch2.18 5128.09,4918.91 v1(5144.25,4902.75) ; U1_ch3.18 5253.54,5416.54 5212.98,5375.98 4970.47,5375.98 4954.72,5391.73 4787.6,5391.73 4779.53,5383.66 4779.53,5340.55 4761.81,5322.83 4702.3,5322.83 4651.57,5373.56 4651.57,5481.43 4608,5525 4535,5525 4508.66,5498.66 U1_ch4.18 4508.66,5429.92 4393.7,5314.96 4206.69,5314.96 4185.04,5293.31 4137.8,5293.31
  Bottom Layer w10: v1(3967,5225) 3975.6,5216.4 3975.6,5139.76 v1(3978.1,5139.76) ; v1@4490.16,4896.87 v1(4491.1,4895.93) 4542.02,4946.85 4765.75,4946.85 4808.9,4990 4969,4990 5014,4945 5102,4945 v1(5144.25,4902.75)
TX1: MOD1.18 U1_ch1.19 U1_ch2.19 U1_ch3.19 U1_ch4.19 | length 3565.2
  Top Layer w10: v1(4437.01,4899.61) 4434.84,4901.77 U1_ch1.19 4434.84,4988.39 4421.26,5001.97 4322.83,5001.97 4255.91,4935.04 4255.91,4869.91 4171.84,4785.84 4105.16,4785.84 4048.68,4842.32 MOD1.18 4003.53,4842.32 3947.14,4898.71 3947.14,5161.14 3978.91,5192.91 4169.29,5192.91 4210,5233.62 4269.69,5293.31 4411.42,5293.31 4533.66,5415.55 U1_ch4.19 4533.66,5491.66 4547.91,5505.91 4594.27,5505.91 4614.17,5486 4614.17,5346.46 4656.63,5304 4796.39,5304 4807.09,5293.31 4960.63,5293.31 4990.16,5322.83 4990.16,5340.16 4998,5348 5221,5348 5278.54,5405.54 U1_ch3.19 ; v1(5069,4907) 5093,4907 5103.09,4917.09 U1_ch2.19
  Bottom Layer w10: v1(4437.01,4899.61) 4469.43,4867.18 4510.89,4867.18 4555.12,4911.42 4793.58,4911.42 4811,4894 4975,4894 4988,4907 v1(5069,4907)
V1: P1.2 R7_ch1.1 | length 1263
  Top Layer w20: 4801.18,5092.52 4984.25,5092.52
  Top Layer w30: R7_ch1.1 4785.43,4762.57 4740.16,4807.84 4740.16,5031.5 4801.18,5092.52 ; 4984.25,5092.52 5354.33,5092.52 5431.5,5015.35 P1.2
V2: P1.1 R7_ch2.1 | length 288.9
  Top Layer w30: R7_ch2.1 5453.68,4798.17 5570.87,4915.35 P1.1
V3: P1.4 R7_ch3.1 | length 1053.4
  Top Layer w30: R7_ch3.1 4927.95,5638.05 4960,5606 4976,5606 v1(5000,5582) ; v1(5027.56,5314.96) 5074.8,5267.72 5486.22,5267.72 5538.58,5215.35 P1.4
  Bottom Layer w30: v1(5000,5582) 5027.56,5554.44 v1(5027.56,5314.96)
V4: P1.3 R7_ch4.1 | length 1863.4
  Top Layer w20: 4799.52,5192.61 4962.76,5192.61
  Top Layer w30: R7_ch4.1 4183.07,5616.94 4228.35,5571.67 4228.35,5419.29 v1(4257.87,5389.76) ; v1(4293.31,5259.84) 4732.28,5259.84 4799.52,5192.61 ; 4962.76,5192.61 5407.79,5192.61 5485.04,5115.35 P1.3
  Bottom Layer w30: v1(4257.87,5389.76) 4257.87,5295.28 v1(4293.31,5259.84)
V_F_ch1: C5_ch1.1 R7_ch1.2 R8_ch1.2 U1_ch1.7 | length 278.5
  Top Layer w8: U1_ch1.7 4559.84,4727.16 4593.76,4693.24 C5_ch1.1@4676.83,4693.24
  Top Layer w10: C5_ch1.1@4678.69,4691.39 C5_ch1.1 C5_ch1.1@4678.69,4691.39
  Top Layer w20: C5_ch1.1 R8_ch1.2 R7_ch1.2
V_F_ch2: C5_ch2.1 R7_ch2.2 R8_ch2.2 U1_ch2.7 | length 263.9
  Top Layer w8: U1_ch2.7 5228.09,4726.91 5262,4693 C5_ch2.1@5345.08,4693
  Top Layer w10: C5_ch2.1@5346.93,4691.15 C5_ch2.1
  Top Layer w20: C5_ch2.1 R8_ch2.2 R7_ch2.2
V_F_ch3: C5_ch3.1 R7_ch3.2 R8_ch3.2 U1_ch3.7 | length 263.9
  Top Layer w8: C5_ch3.1@5036.55,5715.14 5119.63,5715.14 5153.54,5681.23 U1_ch3.7
  Top Layer w10: C5_ch3.1 C5_ch3.1@5034.7,5716.99
  Top Layer w20: R7_ch3.2 R8_ch3.2 C5_ch3.1
V_F_ch4: C5_ch4.1 R7_ch4.2 R8_ch4.2 U1_ch4.7 | length 263.9
  Top Layer w8: C5_ch4.1@4291.67,5722.11 4374.75,5722.11 4408.66,5688.2 U1_ch4.7
  Top Layer w10: C5_ch4.1 C5_ch4.1@4289.82,5723.96
  Top Layer w20: R7_ch4.2 R8_ch4.2 C5_ch4.1
VBUS: MOD1.32 P1.6 | length 2914
  Top Layer w30: MOD1.32 4038.19,6081.5 4232.28,6275.59 5358.27,6275.59 5633.86,6000 P1.6
ZX1: MOD1.22 U1_ch1.13 | length 676.4
  Top Layer w10: MOD1.22 4088.39,5092.52 4192.91,5092.52 4206.69,5106.3 4503.94,5106.3 4584.84,5025.39 U1_ch1.13
pads on no net: MOD1.1 MOD1.2 MOD1.3 MOD1.6 MOD1.7 MOD1.8 MOD1.9 MOD1.10 MOD1.11 MOD1.12 MOD1.14 MOD1.21 MOD1.23 MOD1.24 MOD1.25 MOD1.26 MOD1.31 MOD1.DNC U1_ch1.16 U1_ch1.17 U1_ch1.20 U1_ch2.16 U1_ch2.17 U1_ch2.20 U1_ch3.16 U1_ch3.17 U1_ch3.20 U1_ch4.16 U1_ch4.17 U1_ch4.20

## Polygon pours and split planes (outlines as drawn)
GND on Bottom Layer "GND_L02_P000" (solid, remove dead copper, pour order 0): 3907.48,6411.42 5706.69,6411.42 5706.69,3982.28 3907.48,3982.28

## Silkscreen, mask and mechanical layers (free items; w line width, h text height)
Top Overlay:
  lines w5: 3944.88,6162.16 ccw(c4013.78,6281.5) 4102.35,6387.05 ; 5511.82,6387.05 ccw(c5600.39,6281.5) 5669.29,6162.16 ; 5640.79,4154.76 cw(c5600.39,4265.75) 5640.79,4376.74
Mechanical 1:
  the board outline again, w10